# Altium PCB Motor Driver.PcbDoc
Units mil, origin at the board's own origin, x right, y up, seen from the top; angles counter-clockwise.
Board outline 1620 x 1620 mil, 4 copper layers (Top Layer, Signal Layer1, Signal Layer2, Bottom Layer), stack 23.756 mil thick; 62 components, 48 nets, 235 pads, 78 vias.
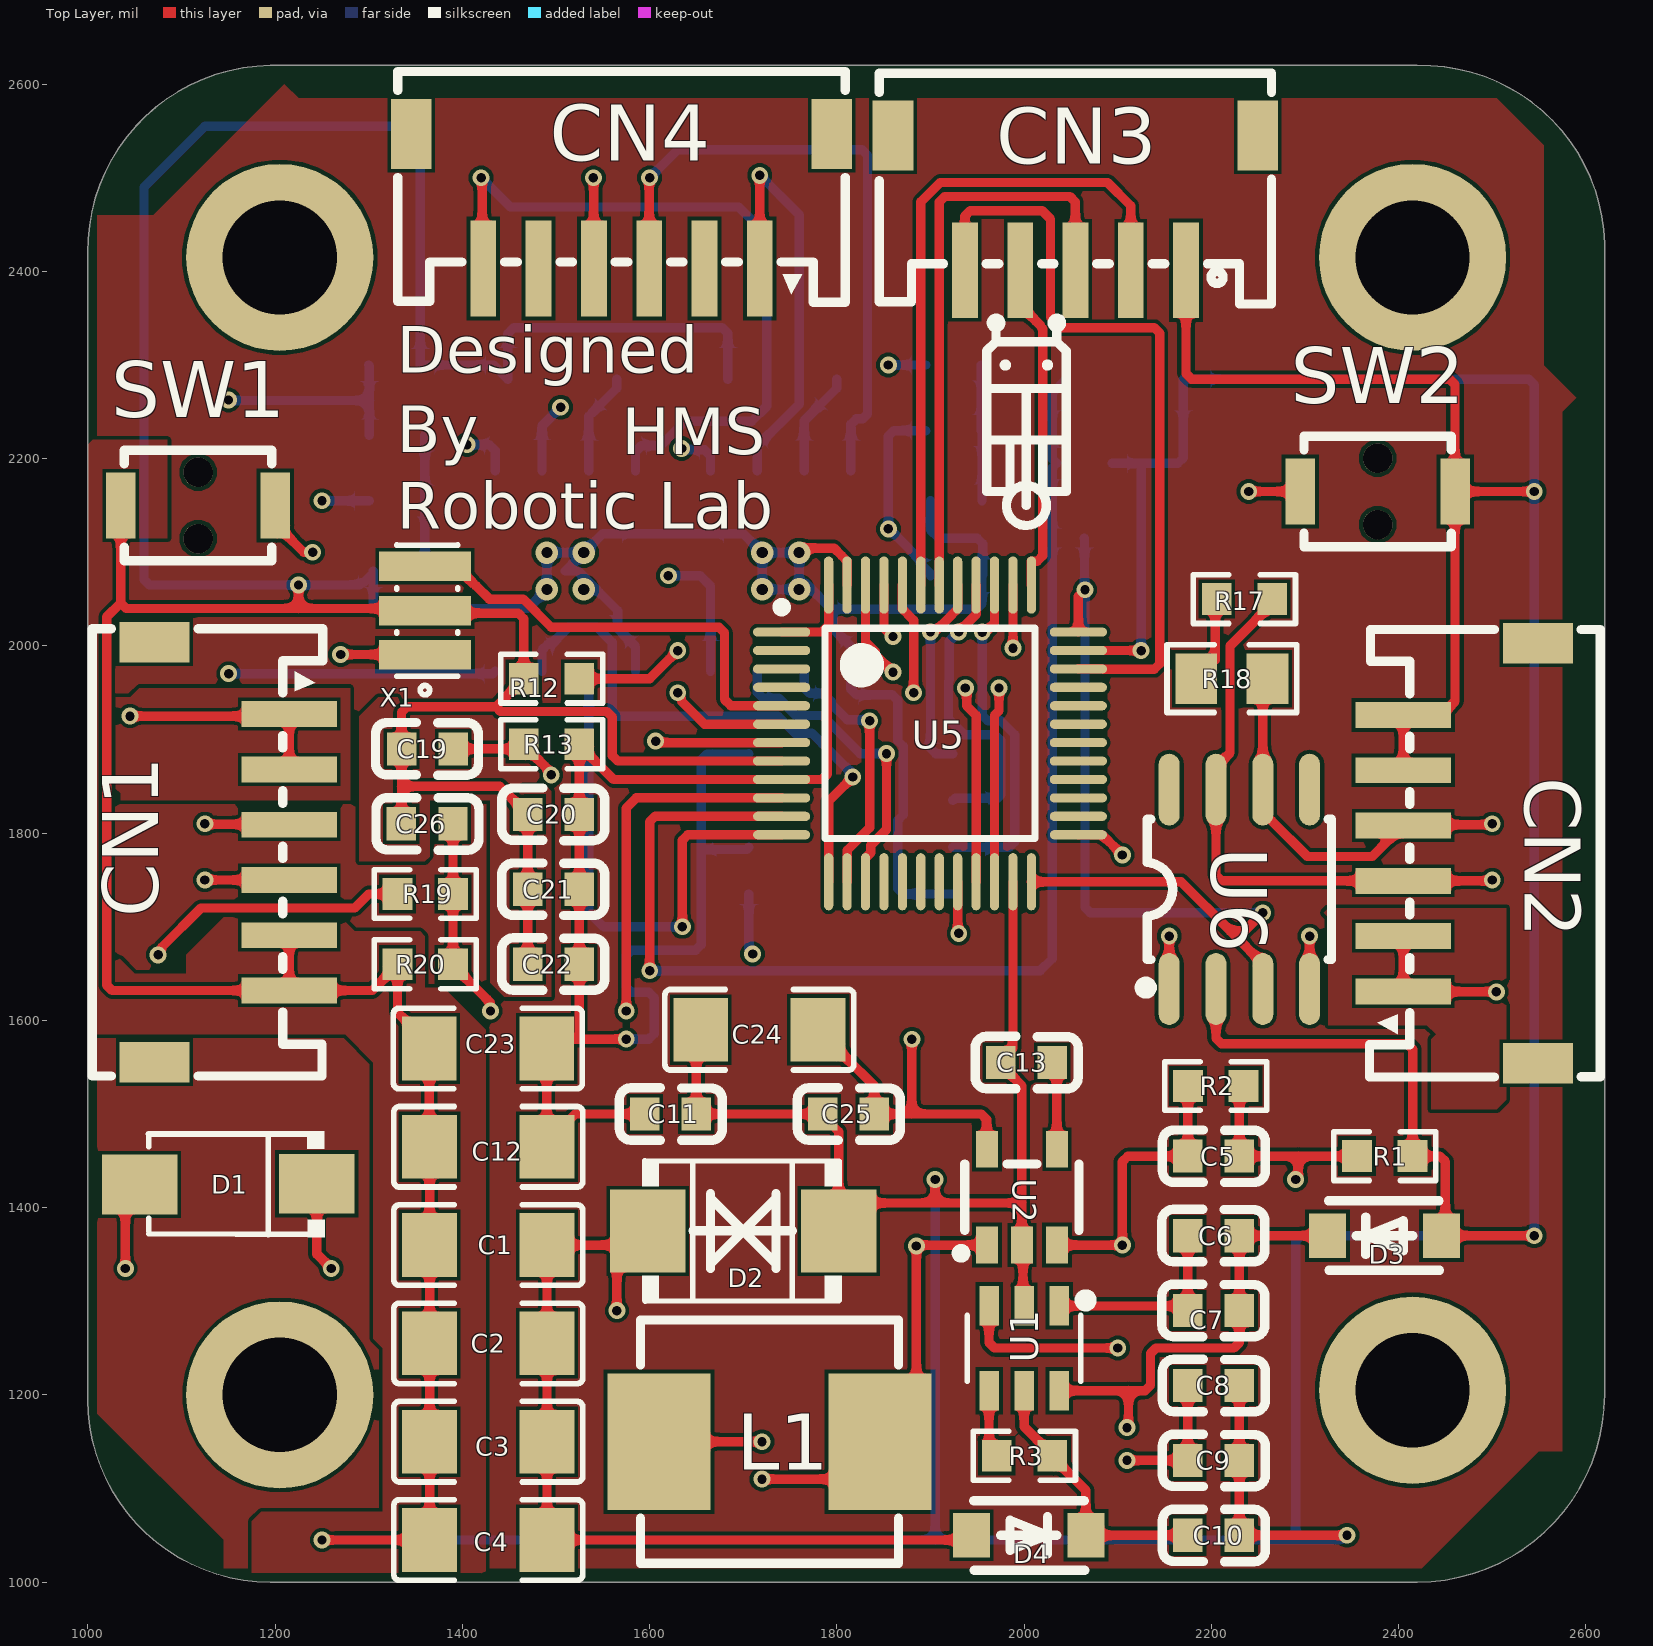
[diagram p0: Top Layer view]
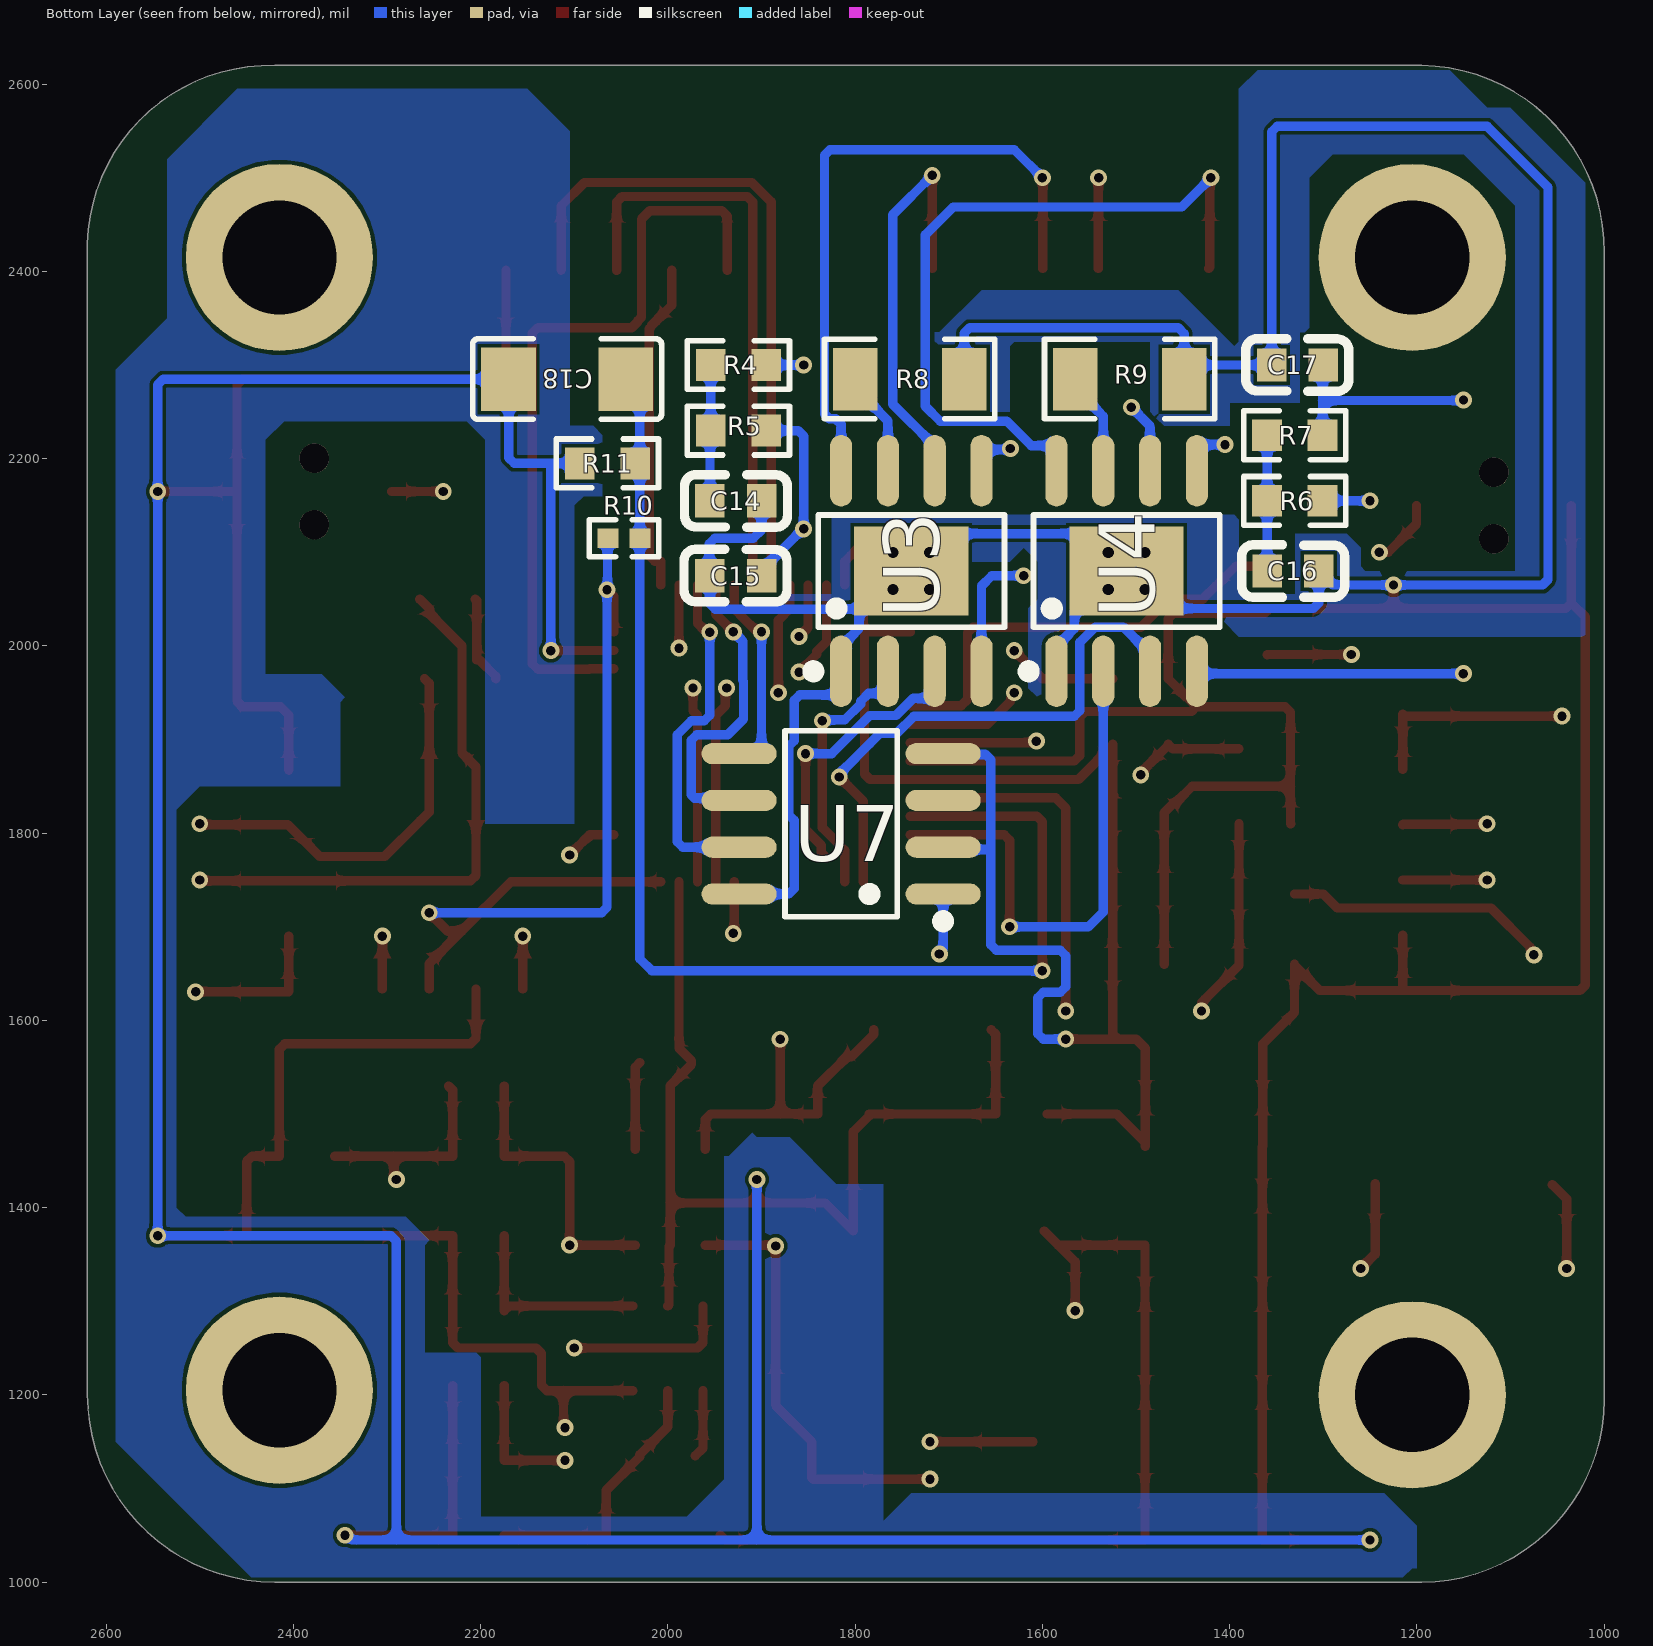
[diagram p1: Bottom Layer view, seen from below]
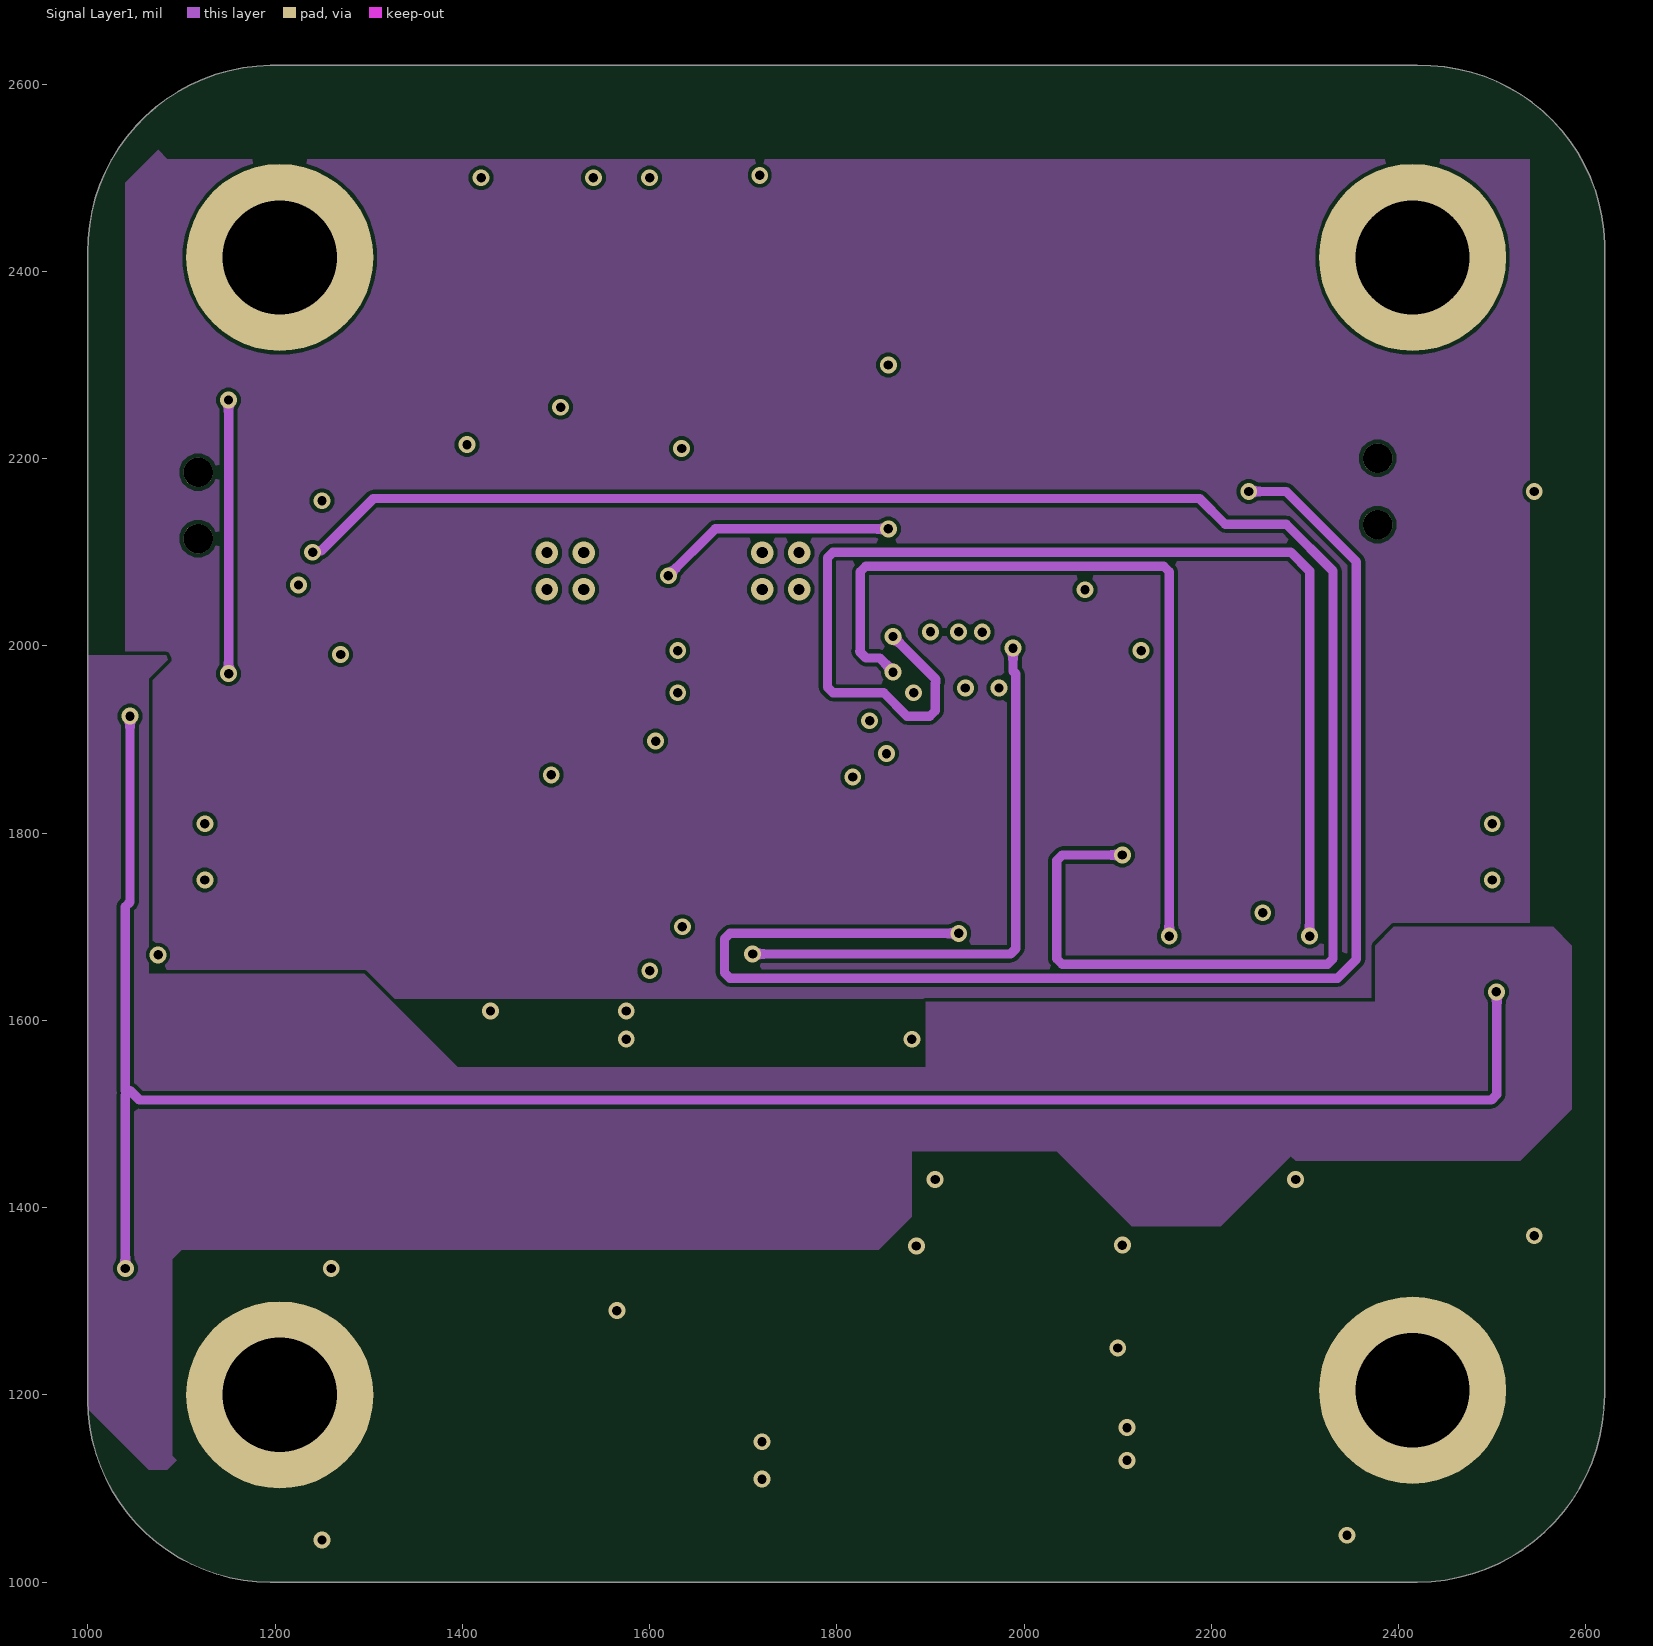
[diagram p2: Signal Layer1]
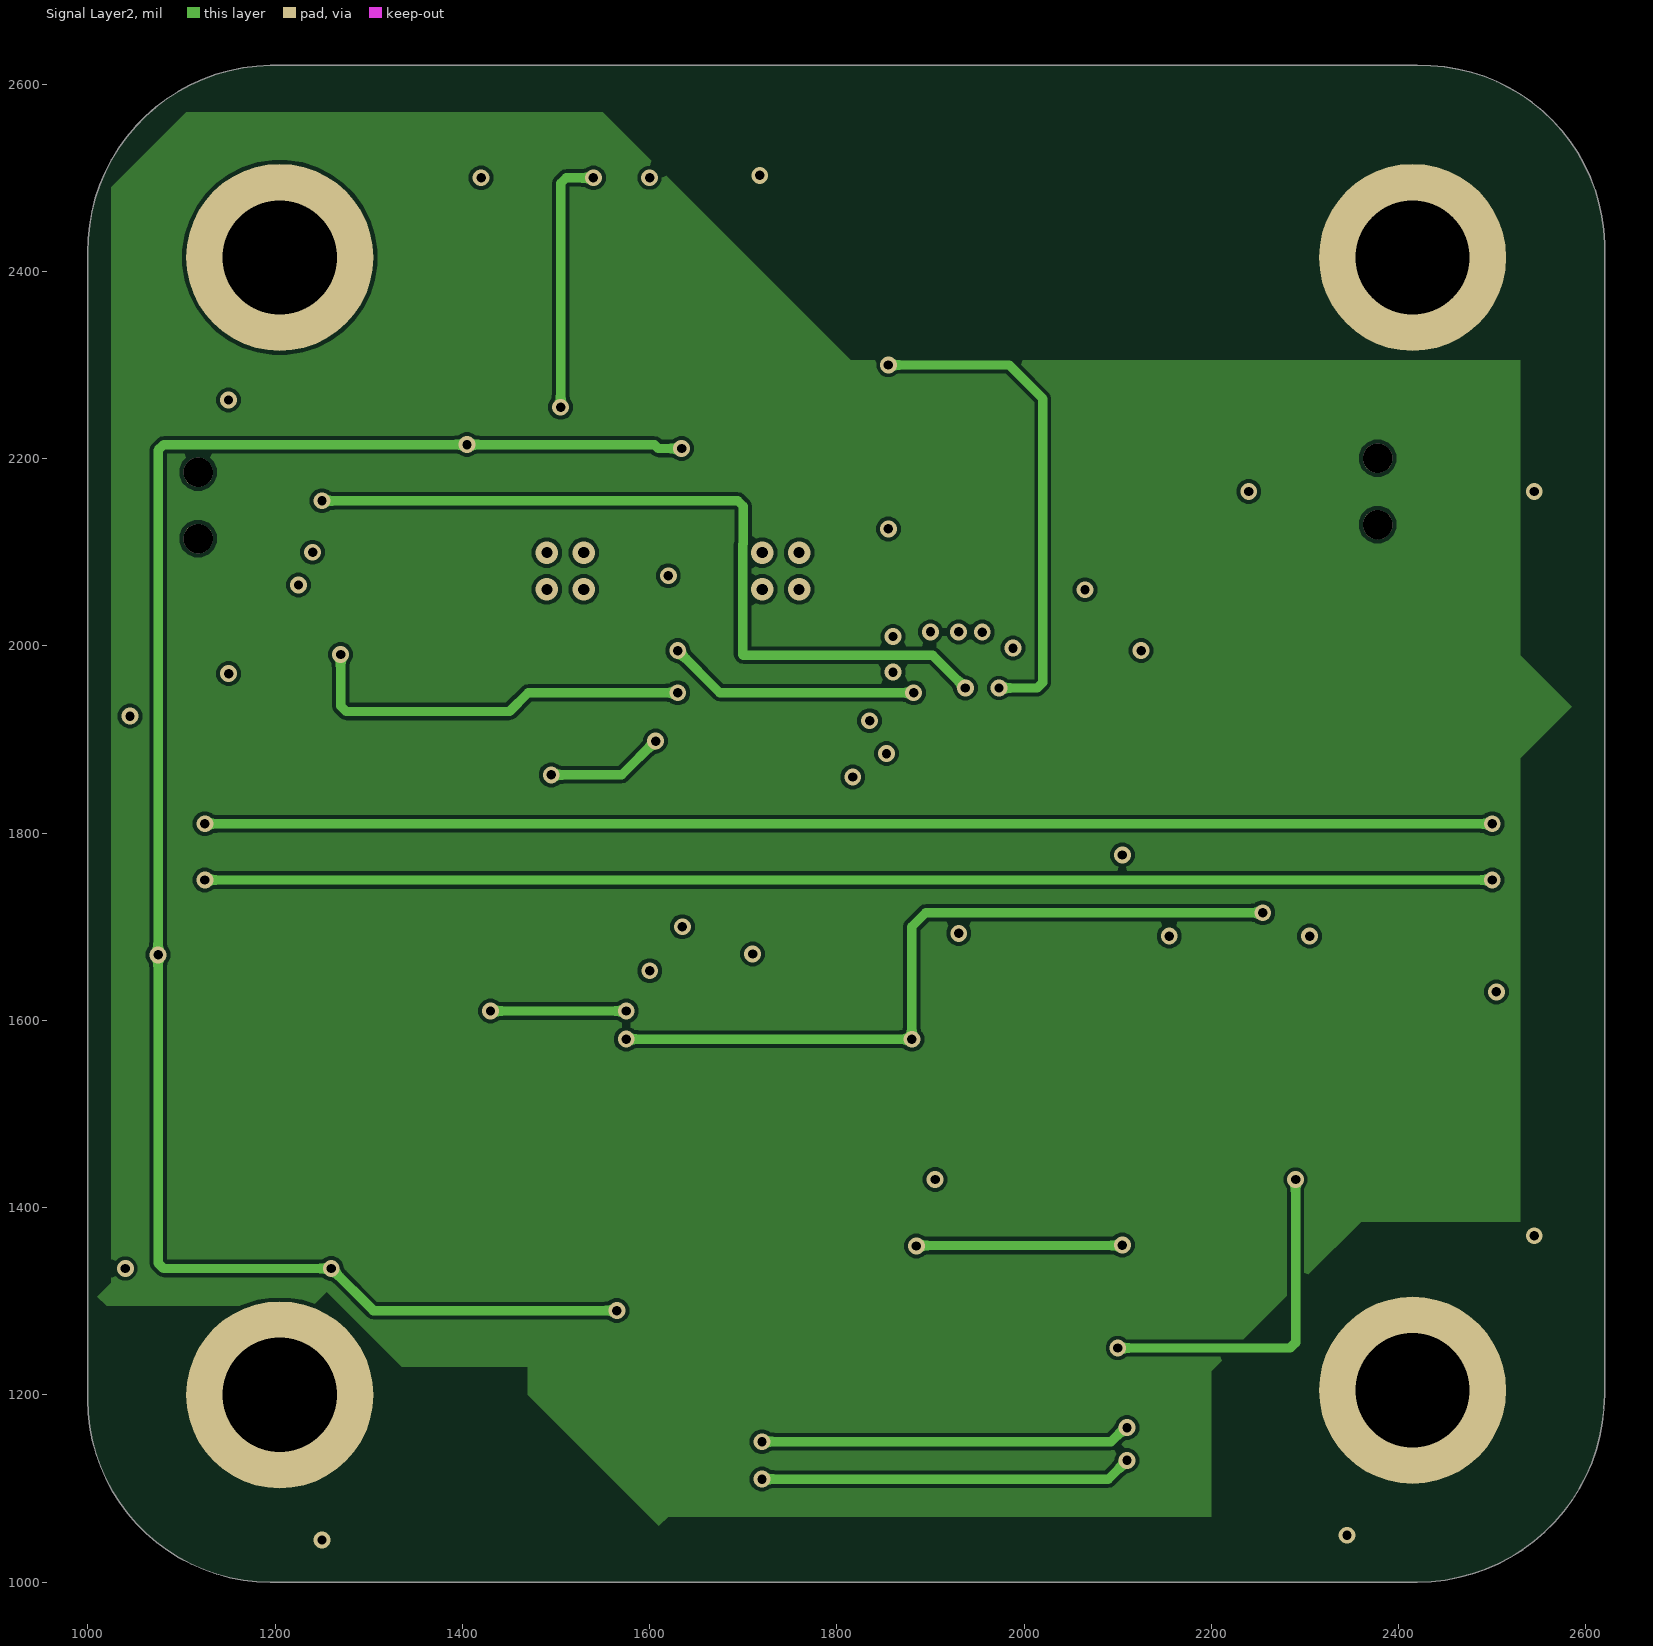
[diagram p3: Signal Layer2]

## Layer stack, top to bottom
Top Solder: solder mask 0.4, Solder Resist, Dk 3.5
Top Layer: signal copper 1.4
Dielectric 2: prepreg 2.8, PP-006, Dk 4.1
Signal Layer1: signal copper 1.378
Dielectric 1: dielectric 12.6, FR-4, Dk 4.8
Signal Layer2: signal copper 1.378
Dielectric 3: prepreg 2.8, PP-006, Dk 4.1
Bottom Layer: signal copper 1.4
Bottom Solder: solder mask 0.4, Solder Resist, Dk 3.5

## Board outline
1195,1000 cw(c1195,1195) 1000,1195 1000,2420 cw(c1197.5,2422.5) 1195,2620 2420,2620 cw(c2425,2425) 2620,2430 2620,1200 cw(c2420,1200) 2420,1000

## Design rules (kind name [scope] priority, off if disabled: settings)
Clearance [All] p1: gap=4 ignorepadtopadclearanceinfootprint=FALSE
HoleSize [All] p1: absolutevalues=TRUE maxlimit=10000 minlimit=8 maxpercent=80.000 minpercent=20.000
MinimumSolderMaskSliver [All] p1: minsoldermaskwidth=1
PolygonConnect [All] p1: connectstyle=Relief reliefconductorwidth=10 reliefentries=4 polygonreliefangle="90 Angle" airgapwidth=10
RoutingVias [All] p1: holewidth=28 width=50 viastyle="Through Hole" minholewidth=28 minwidth=50 maxholewidth=28 maxwidth=50
SilkToSilkClearance [All] p1: silktosilkclearance=0
SilkToSolderMaskClearance [IsPad] p1: minsilkscreentomaskgap=0 clearancetoexposedcopper=TRUE
SolderMaskExpansion [All] p1: expansion=4 istentingtop=FALSE
Width [All] p1: maxlimit=10 minlimit=10 preferedwidth=10
26 further rules are at their usual default settings.

## Classes and differential pairs
component class Port: C23 CN1 CN2 CN3 CN4 R17 R18 SW1 SW2 U6
component class MCU: C19 C20 C21 C22 R12 R13 U5 X1
component class Interface: C24 C25 C26 R19 R20 U7
component class Drive: C14 C15 C16 C17 C18 R4 R5 R6 R7 R8 R9 R10 R11 U3 U4
component class Power: C1 C2 C3 C4 C6 C7 C8 C9 C10 C11 C12 C13 D1 D2 D3 D4 L1 R1 R2 R3 U1 U2

## Components (designator, comment, footprint, x,y, rotation, side; value= is the part's Value field where it differs from the comment)
C1 "100uF" C1206 1427.7,1360 r180 top
C2 "100uF" C1206 1427.7,1255 r180 top
C3 "100uF" C1206 1427.7,1150 r180 top
C4 "100uF" C1206 1427.7,1045 r180 top
C5 "100pF" C0603 2202.45,1455 r180 top
C6 "100nF" C0603 2202.45,1370 r0 top
C7 "100nF" C0603 2202.45,1290 r0 top
C8 "100nF" C0603 2202.45,1210 r180 top
C9 "100nF" C0603 2202.45,1130 r180 top
C10 "100nF" C0603 2202.45,1050 r180 top
C11 "100nF" C0603 1622.44,1500 r180 top
C12 "10uF" C1206 1427.7,1465 r0 top
C13 "10nF" C0603 2002.44,1555 r180 top
C14 "100nF" C0603 1927.56,2155 r0 bottom
C15 "100nF" C0603 1927.56,2075 r180 bottom
C16 "100nF" C0603 1332.44,2080 r0 bottom
C17 "100nF" C0603 1327.44,2300 r180 bottom
C18 "10uF" C1206 2107.7,2285 r180 bottom
C19 "100nF" C0603 1362.56,1890 r0 top
C20 "100nF" C0603 1497.44,1820 r0 top
C21 "100nF" C0603 1497.44,1740 r0 top
C22 "100nF" C0603 1497.44,1660 r0 top
C23 "10uF" C1206 1427.3,1570 r180 top
C24 "10uF" C1206 1717.3,1590 r180 top
C25 "100nF" C0603 1812.56,1500 r180 top
C26 "100nF" C0603 1362.44,1810 r180 top
CN1 "HC-ZH-6PWT" CONN-SMD_6P-P1.50_HCTL_HC-ZH-6PWT 1143.15,1779.53 r270 top
CN2 "HC-ZH-6PWT" CONN-SMD_6P-P1.50_HCTL_HC-ZH-6PWT 2476.85,1778.58 r90 top
CN3 "HC-ZH-5PWT" CONN-SMD_5P-P1.50_HCTL_HC-ZH-5PWT 2054.88,2473.15 r180 top
CN4 "HC-ZH-6PWT" CONN-SMD_6P-P1.50_HCTL_HC-ZH-6PWT 1570,2475 r180 top
D1 "SS54" SMA_L4.3-W2.6-LS5.0-RD 1150,1425 r180 top
D2 "SMBJ28CA" SMB_L4.6-W3.6-LS5.3-BI 1700,1375 r180 top
D3 "1N5819W" SOD-123F_L2.8-W1.8-LS3.7-RD 2385,1370 r0 top
D4 "1N5819W" SOD-123F_L2.8-W1.8-LS3.7-RD 2005,1050 r180 top
L1 "6.8uH" IND-SMD_L7.0-W6.6 1728.11,1150 r0 top
R1 "1.8K" R0603 2385.34,1455 r180 top
R2 "10K" R0603 2204.66,1530 r180 top
R3 "1M" R0603 2000.35,1135 r0 top
R4 "1K" R0603 1924.65,2300 r0 bottom
R5 "1K" R0603 1924.65,2230 r180 bottom
R6 "1K" R0603 1330.35,2155 r0 bottom
R7 "1K" R0603 1330.35,2225 r180 bottom
R8 "0.1" R1206 1741.78,2285 r180 bottom
R9 "0.1" R1206 1506.78,2285 r180 bottom
R10 "NTCThermistor" R0402 2047.04,2115 r180 bottom
R11 "3.3K" R0603_NEW 2064.66,2195 r180 bottom
R12 "10K" R0603 1495.35,1965 r180 top
R13 "10K" R0603 1495.35,1895 r0 top
R17 "120" R0603 2235.34,2050 r180 top
R18 "0" R0805 2221.96,1965 r0 top
R19 "10K" R0603 1360.35,1735 r0 top
R20 "1K" R0603 1360.35,1660 r180 top
SW1 "K2-1807UA-A4DW-06" KEY-SMD_L4.0-W2.9-L 1117.67,2150 r0 top
SW2 "K2-1807UA-A4DW-06" KEY-SMD_L4.0-W2.9-L 2377.68,2165 r180 top
U1 "ME3116" SOT-23-6_L2.9-W1.6-P0.95-LS2.8-BL 2000,1249.76 r180 top
U2 "LP2992IM5-3.3/NOPB" SOT-23-5_L3.0-W1.7-P0.95-LS2.8-BR 1997.6,1411.18 r270 top
U3 "A4950ELJTR-T" SOIC-8_L4.9-W3.9-P1.27-LS6.0-BL-EP 1740,2080 r180 bottom
U4 "A4950ELJTR-T" SOIC-8_L4.9-W3.9-P1.27-LS6.0-BL-EP 1510,2080 r180 bottom
U5 "STM32F103CBT6" STM-LQFP48_L 1899.53,1906.54 r0 top
U6 "SN65HVD232DR" SOIC-8_L5.0-W4.0-P1.27-LS6.0-BL 2230,1740 r0 top
U7 "MT6816CT-ACD" SOP-8_L5.0-W4.0-P1.27-LS6.0-BL 1815,1810 r90 bottom
X1 "12MHz" CRYSTAL-SMD_3P-L3.2-W1.3-P1.2-BL 1360,2037.76 r90 top

## Footprints (in the part's own frame and the unit in brackets; to place one, negate y for a bottom-side part, rotate by r counter-clockwise, add the part's x,y. Pads: shape width x height; smd on the part's side, far side on the other; paste and mask are expansions set on the pad)
C0603 [mm]
  rect 0.8x0.9 smd: 1(-0.7,0) 2(0.7,0)
  silkscreen extent -1.41,-0.71 1.39,0.72
C1206 [mm]
  rect 1.485x1.728 smd: 1(-1.593,0) 2(1.593,0)
  silkscreen extent -2.56,-1.09 2.56,1.09
CONN-SMD_5P-P1.50_HCTL_HC-ZH-5PWT [mm]
  rect 0.7x2.6 smd: 1(-3,1.825) 2(-1.5,1.825) 3(0,1.825) 4(1.5,1.825) 5(3,1.825)
  rect 1.1x1.9 smd: 6(4.95,-1.825) 7(-4.95,-1.825)
  silkscreen extent -5.32,-3.52 5.32,2.74
CONN-SMD_6P-P1.50_HCTL_HC-ZH-6PWT [mm]
  rect 0.7x2.6 smd: 1(-3.75,1.825) 2(-2.25,1.825) 3(-0.75,1.825) 4(0.75,1.825) 5(2.25,1.825) 6(3.75,1.825)
  rect 1.1x1.9 smd: 7(-5.7,-1.825) 8(5.7,-1.825)
  silkscreen extent -6.07,-3.52 6.07,2.74
CRYSTAL-SMD_3P-L3.2-W1.3-P1.2-BL [mm]
  rect 0.8x2.5 smd: 1(-1.2,0) 2(0,0) 3(1.2,0)
  silkscreen extent -2.29,-0.89 1.78,0.76
IND-SMD_L7.0-W6.6 [mm]
  rect 2.8x3.7 smd: 1(-3,0) 2(3,0)
  silkscreen extent -3.5,-3.3 3.5,3.3
KEY-SMD_L4.0-W2.9-L [mm]
  rect 0.8x1.8 smd: 1(-2.1,0) 2(2.1,0)
  round 0.8 hole 0.8 unplated: ""(0,-0.9) ""(0,0.9)
  silkscreen extent -2,-1.5 2,1.5
R0402 [mm]
  rect 0.566x0.54 smd: 1(-0.433,0) 2(0.433,0)
  silkscreen extent -0.94,-0.5 0.94,0.5
R0603 [mil]
  rect 31.75x34.02 smd: 1(-29.66,0) 2(29.65,0)
  silkscreen extent -55,-26 55,26
R0603_NEW [mil]
  rect 31.75x34.02 smd: 1(-29.65,0) 2(29.66,0)
  silkscreen extent -55,-26 55,26
R0805 [mil]
  rect 44.59x54.21 smd: 1(-38.04,0) 2(38.04,0)
  silkscreen extent -69,-36 69,36
R1206 [mil]
  rect 47.54x66.97 smd: 1(-58.22,0) 2(58.22,0)
  silkscreen extent -91,-42 91,42
SMA_L4.3-W2.6-LS5.0-RD [mm]
  rect 2.046x1.62 smd: 1(-2.404,-0.009) 2(2.404,0.009)
  silkscreen extent -2.61,-1.44 2.16,1.44
SMB_L4.6-W3.6-LS5.3-BI [mil]
  rect 80.61x88.23 smd: 1(-102.02,0) 2(102.02,0)
  silkscreen extent -105,-75 108,75
SOD-123F_L2.8-W1.8-LS3.7-RD [mm]
  rect 1x1.2 smd: 1(-1.55,0) 2(1.55,0)
  silkscreen extent -1.52,-0.93 1.49,0.95
SOIC-8_L4.9-W3.9-P1.27-LS6.0-BL-EP [mm]
  oval 0.602x1.941 smd: 1(-1.905,-2.72) 2(-0.635,-2.72) 3(0.635,-2.72) 4(1.905,-2.72) 5(1.905,2.72) 6(0.635,2.72) 7(-0.635,2.72) 8(-1.905,2.72)
  rect 3.098x2.41 smd: 9(0,0)
  silkscreen extent -2.81,-2.87 2.53,1.52
SOIC-8_L5.0-W4.0-P1.27-LS6.0-BL [mil]
  oval 22.38x76.78 smd: 1(-75,-106.5) 2(-25,-106.5) 3(25,-106.5) 4(75,-106.5) 5(75,106.5) 6(25,106.5) 7(-25,106.5) 8(-75,106.5)
  silkscreen extent -106,-111 98,75
SOP-8_L5.0-W4.0-P1.27-LS6.0-BL [mil]
  oval 22.6x80.14 smd: 1(-75,-108.97) 2(-25,-108.97) 3(25,-108.97) 4(75,-108.97) 5(75,108.97) 6(25,108.97) 7(-25,108.97) 8(-75,108.97)
  silkscreen extent -110,-115 99,60
SOT-23-5_L3.0-W1.7-P0.95-LS2.8-BR [mm]
  rect 1x0.6 smd: 1(1.3,-0.95) 2(1.3,0) 3(1.3,0.95) 4(-1.3,0.95) 5(-1.3,-0.95)
  silkscreen extent -0.9,-1.78 1.65,1.55
SOT-23-6_L2.9-W1.6-P0.95-LS2.8-BL [mm]
  rect 0.532x1.072 smd: 1(-0.95,-1.149) 2(0,-1.149) 3(0.95,-1.149) 4(0.95,1.149) 5(0,1.149) 6(-0.95,1.149)
  silkscreen extent -1.82,-1.45 1.54,0.89
STM-LQFP48_L [mm] "QFP, 48-Leads, Body 7x7mm, Pitch 0.5mm, IPC High Density"
  oval 1.55x0.25 smd: 1(-4.025,2.75) 2(-4.025,2.25) 3(-4.025,1.75) 4(-4.025,1.25) 5(-4.025,0.75) 6(-4.025,0.25) 7(-4.025,-0.25) 8(-4.025,-0.75) 9(-4.025,-1.25) 10(-4.025,-1.75) 11(-4.025,-2.25) 12(-4.025,-2.75) 25(4.025,-2.75) 26(4.025,-2.25) 27(4.025,-1.75) 28(4.025,-1.25) 29(4.025,-0.75) 30(4.025,-0.25) 31(4.025,0.25) 32(4.025,0.75) 33(4.025,1.25) 34(4.025,1.75) 35(4.025,2.25) 36(4.025,2.75)
  oval 0.25x1.55 smd: 13(-2.75,-4.025) 14(-2.25,-4.025) 15(-1.75,-4.025) 16(-1.25,-4.025) 17(-0.75,-4.025) 18(-0.25,-4.025) 19(0.25,-4.025) 20(0.75,-4.025) 21(1.25,-4.025) 22(1.75,-4.025) 23(2.25,-4.025) 24(2.75,-4.025) 37(2.75,4.025) 38(2.25,4.025) 39(1.75,4.025) 40(1.25,4.025) 41(0.75,4.025) 42(0.25,4.025) 43(-0.25,4.025) 44(-0.75,4.025) 45(-1.25,4.025) 46(-1.75,4.025) 47(-2.25,4.025) 48(-2.75,4.025)
  silkscreen extent -4.15,-2.85 2.85,3.55, body extent -3.5,-3.5 3.5,3.5, height 1.6

## Part data
C1 C2 C3 C4: BOM_JLCPCB Part Class="Extended Part", BOM_Manufacturer="Murata Electronics", BOM_Manufacturer Part=GRM31CR61A107ME05L, BOM_Supplier=LCSC, BOM_Supplier Part=C312983, Contributor=LCSC, nameAlias=Capacitance, spicePre=C, spiceSymbolName=GRM31CR61A107ME05L
C5: BOM_JLCPCB Part Class="Extended Part", BOM_Manufacturer=YAGEO, BOM_Manufacturer Part=CC0603JRNPO9BN101, BOM_Supplier=LCSC, BOM_Supplier Part=C14665, nameAlias=Capacitance, spicePre=C, spiceSymbolName=CC0603JRNPO9BN101
C6 C7 C8 C9 C10 C11 C14 C15 C16 C17 C19 C20 C21 C22 C25 C26: BOM_JLCPCB Part Class="Extended Part", BOM_Manufacturer=SAMSUNG, BOM_Manufacturer Part=CL10B104KB8NNNC, BOM_Supplier=LCSC, BOM_Supplier Part=C1591, nameAlias=Capacitance, spicePre=C, spiceSymbolName=CL10B104KB8NNNC
C12 C18 C23 C24: BOM_JLCPCB Part Class="Basic Part", BOM_Manufacturer=SAMSUNG, BOM_Manufacturer Part=CL31A106KBHNNNE, BOM_Supplier=LCSC, BOM_Supplier Part=C13585, nameAlias=Capacitance, spicePre=C, spiceSymbolName=CL31A106KBHNNNE
C13: BOM_JLCPCB Part Class="Extended Part", BOM_Manufacturer=YAGEO, BOM_Manufacturer Part=CC0603KRX7R9BB103, BOM_Supplier=LCSC, BOM_Supplier Part=C100042, nameAlias=Capacitance, spicePre=C, spiceSymbolName=CC0603KRX7R9BB103
CN1 CN2 CN3 CN4: BOM_Manufacturer=HCTL(华灿天禄), BOM_Supplier=LCSC, Contributor=LCSC, spicePre=C
  CN1 CN2 CN4: BOM_Manufacturer Part=HC-ZH-6PWT, BOM_Supplier Part=C2845428, spiceSymbolName=HC-ZH-6PWT
  CN3: BOM_Manufacturer Part=HC-ZH-5PWT, BOM_Supplier Part=C2845427, spiceSymbolName=HC-ZH-5PWT
D1: library part SS54_C727065, BOM_JLCPCB Part Class="Extended Part", BOM_Manufacturer=TWGMC, BOM_Manufacturer Part=SS54, BOM_Supplier=LCSC, BOM_Supplier Part=C727065, Contributor=LCSC, spicePre=D, spiceSymbolName=SS54_C727065
D2: library part SMBJ28CA_C908204, BOM_JLCPCB Part Class="Extended Part", BOM_Manufacturer=FUXINSEMI, BOM_Manufacturer Part=SMBJ28CA, BOM_Supplier=LCSC, BOM_Supplier Part=C908204, Contributor=LCSC, spicePre=D, spiceSymbolName=SMBJ28CA_C908204
D3 D4: BOM_JLCPCB Part Class="Extended Part", BOM_Manufacturer="Shandong Jingdao Microelectronics", BOM_Manufacturer Part=1N5819W, BOM_Supplier=LCSC, BOM_Supplier Part=C169540, Contributor=LCSC, spicePre=D, spiceSymbolName=1N5819W
L1: BOM_JLCPCB Part Class="Extended Part", BOM_Manufacturer=Sunlord, BOM_Manufacturer Part=MWSA0603S-6R8MT, BOM_Supplier=LCSC, BOM_Supplier Part=C408449, Contributor=LCSC, nameAlias=Inductance, spicePre=L, spiceSymbolName=MWSA0603S-6R8MT
R1: BOM_JLCPCB Part Class="Basic Part", BOM_Manufacturer=UniOhm, BOM_Manufacturer Part=0603WAF1801T5E, BOM_Supplier=LCSC, BOM_Supplier Part=C4177, nameAlias="Resistance (Ohms)", spicePre=R, spiceSymbolName=0603WAF1801T5E
R2 R12 R13 R19: BOM_JLCPCB Part Class="Basic Part", BOM_Manufacturer=UniOhm, BOM_Manufacturer Part=0603WAF1002T5E, BOM_Supplier=LCSC, BOM_Supplier Part=C25804, nameAlias="Resistance (Ohms)", spicePre=R, spiceSymbolName=0603WAF1002T5E
R3: BOM_JLCPCB Part Class="Basic Part", BOM_Manufacturer=UniOhm, BOM_Manufacturer Part=0603WAF1004T5E, BOM_Supplier=LCSC, BOM_Supplier Part=C22935, nameAlias="Resistance (Ohms)", spicePre=R, spiceSymbolName=0603WAF1004T5E
R4 R5 R6 R7 R20: BOM_JLCPCB Part Class="Basic Part", BOM_Manufacturer=UniOhm, BOM_Manufacturer Part=0603WAF1001T5E, BOM_Supplier=LCSC, BOM_Supplier Part=C21190, nameAlias="Resistance (Ohms)", spicePre=R, spiceSymbolName=0603WAF1001T5E
R8 R9: BOM_JLCPCB Part Class="Basic Part", BOM_Manufacturer=UniOhm, BOM_Manufacturer Part=1206W4F100LT5E, BOM_Supplier=LCSC, BOM_Supplier Part=C25334, nameAlias="Resistance (Ohms)", spicePre=R, spiceSymbolName=1206W4F100LT5E
R10: BOM_JLCPCB Part Class="Extended Part", BOM_Manufacturer=MuRata, BOM_Manufacturer Part=NCP15XH103F03RC, BOM_Supplier=LCSC, BOM_Supplier Part=C77131, nameAlias=Value, spicePre=R, spiceSymbolName=NCP15XH103F03RC
R11: BOM_JLCPCB Part Class="Basic Part", BOM_Manufacturer=UniOhm, BOM_Manufacturer Part=0603WAF3301T5E, BOM_Supplier=LCSC, BOM_Supplier Part=C22978, nameAlias="Resistance (Ohms)", spicePre=R, spiceSymbolName=0603WAF3301T5E
R17: BOM_JLCPCB Part Class="Basic Part", BOM_Manufacturer=UniOhm, BOM_Manufacturer Part=0603WAF1200T5E, BOM_Supplier=LCSC, BOM_Supplier Part=C22787, nameAlias="Resistance (Ohms)", spicePre=R, spiceSymbolName=0603WAF1200T5E
R18: BOM_JLCPCB Part Class="Extended Part", BOM_Manufacturer=WTC, BOM_Manufacturer Part=WR08X000PTL, BOM_Supplier=LCSC, BOM_Supplier Part=C112378, nameAlias="Resistance (Ohms)", spicePre=R, spiceSymbolName=WR08X000PTL
SW1 SW2: BOM_JLCPCB Part Class="Extended Part", BOM_Manufacturer="Korean Hroparts Elec", BOM_Manufacturer Part=K2-1807UA-A4DW-06, BOM_Supplier=LCSC, BOM_Supplier Part=C502307, Contributor=LCSC, spicePre=S, spiceSymbolName=K2-1807UA-A4DW-06
U1: library part TP6841S6-A, BOM_JLCPCB Part Class="Extended Part", BOM_Manufacturer="TECH PUBLIC(台舟)", BOM_Manufacturer Part=TP6841S6-A, BOM_Supplier=LCSC, BOM_Supplier Part=C2844924, Contributor=LCSC, spicePre=U, spiceSymbolName=TP6841S6-A
U2 U6: BOM_JLCPCB Part Class="Extended Part", BOM_Manufacturer=TI, BOM_Supplier=LCSC, spicePre=U
  U2: BOM_Manufacturer Part=LP2992IM5-3.3/NOPB, BOM_Supplier Part=C129353, Contributor=LCSC, spiceSymbolName=LP2992IM5-3.3/NOPB
  U6: BOM_Manufacturer Part=SN65HVD232DR, BOM_Supplier Part=C30530, spiceSymbolName=SN65HVD232DR
U3 U4: BOM_JLCPCB Part Class="Extended Part", BOM_Manufacturer=ALLEGRO, BOM_Manufacturer Part=A4950ELJTR-T, BOM_Supplier=LCSC, BOM_Supplier Part=C82404, spicePre=U, spiceSymbolName=A4950ELJTR-T
U5: library part CMP-0237-00250-3, "ARM Cortex-M3 32-bit MCU, 128 KB Flash, 20 KB Internal RAM, 37 I/Os, 48-pin LQFP, -40 to 85 degC, Tray", I/Os (High Current)=37, Operating Frequency(F) (Processor speed) (MHz)=72, Supply Voltage(Vcc) min (V)=2, A/D Converter="2x12-bit (10 Channel)", ComponentLink1Description="Manufacturer URL", ComponentLink1URL=http://www.st.com/web/en/home.html, ComponentLink2Description=Datasheet, ComponentLink2URL=http://www.st.com/st-web-ui/static/active/en/resource/technical/document/datasheet/CD00161566.pdf, ComponentLink3Description="Package Specification", ComponentLink3URL=http://www.st.com/st-web-ui/static/active/en/resource/technical/document/datasheet/DM00058181.pdf, Core="ARM Cortex-M3", DatasheetVersion="Rev. 16", FLASH Size (Prog) (kB)=128, Internal RAM Size (kB)=20, Mounting Technology="Surface Mount", PackageDescription="48-Pin Low Profile Quad Flat Package, 7 x 7 mm Body, 0.5 mm Pitch", PackageReference=LQFP48, PackageVersion="Rev. 6, 06/2013", Packing=Tray, PartNumber=STM32F103CBT6
U7: BOM_JLCPCB Part Class="Extended Part", BOM_Manufacturer="Magn Tek", BOM_Manufacturer Part=MT6816CT-ACD, BOM_Supplier=LCSC, BOM_Supplier Part=C879560, Contributor=LCSC, spicePre=U, spiceSymbolName=MT6816CT-ACD
X1: BOM_JLCPCB Part Class="Extended Part", BOM_Manufacturer=muRata(村田), BOM_Manufacturer Part=CSTNE12M0G52A000R0, BOM_Supplier=LCSC, BOM_Supplier Part=C907957, Contributor=LCSC, nameAlias=Frequency, spicePre=X, spiceSymbolName=CSTNE12M0G52A000R0

## Free pads (board coordinates)
  round 200 hole 122.05: GND(1205,1200) GND(1205,2415) GND(2415,1205) GND(2415,2415)

## Via types
v1: diameter 18, hole 10, Top Layer to Bottom Layer, 70 vias
v2: diameter 24, hole 12, Top Layer to Bottom Layer, 8 vias

## Nets (pads, with @x,y where several pads share a name; then routed paths per layer and width w, separated by ;. In a path a pad name is that pad's centre, name@x,y a point inside that pad or via, vN(x,y) a via of type N, cw(c..) or ccw(c..) an arc to the next point about the centre after c; other vN are vias at no path point)
BUTTON_1: SW1.2 U5.25 | length 2165.1
  Top Layer w10: SW1.2 1200.35,2130.32 1230.67,2100 v1(1240,2100) ; U5.25 2083.43,1798.27 v1(2105,1776.69)
  Signal Layer1 w10: v1(1240,2100) 1241.53,2101.53 1249.03,2101.53 1305,2157.5 2187.5,2157.5 2215,2130 2280,2130 2330,2080 2330,1665.86 2324.14,1660 2040.86,1660 2035,1665.86 2035,1770.84 2040.86,1776.69 v1(2105,1776.69)
BUTTON_2: SW2.2 U5.20 | length 1656.1
  Top Layer w10: U5.20 1929.13,1747.99 1929.13,1694.01 v1(1930.17,1692.97) ; v1(2240,2165) SW2.2
  Signal Layer1 w10: v1(1930.17,1692.97) 1685.86,1692.97 1680,1687.11 1680,1650.86 1685.86,1645 2334.8,1645 2355,1665.2 2355,2090 2280,2165 v1(2240,2165)
CAN_H: CN1.4 CN2.3 R17.1 U6.7 | length 2082.8
  Top Layer w10: v1(1124.98,1750.02) CN1.4 ; R17.1 2254.12,2039.12 2254.12,2034.12 2220,2000 2220,1885.75 2205,1870.75 2205,1754.91 2210.86,1749.06 2499.05,1749.06 v1(2500,1750)
  Signal Layer2 w10: v1(1124.98,1750.02) v1(2500,1750)
CAN_L: CN1.3 CN2.4 R18.2 U6.6 | length 1889
  Top Layer w10: v1(1125,1810) 1125.47,1809.53 1214.53,1809.53 CN1.3 ; R18.2 2255,1960 2255,1822.65 2264.54,1813.11 2302.65,1775 2371.89,1775 CN2.4 2405.95,1809.06 2499.05,1809.06 v1(2500,1810)
  Signal Layer2 w10: v1(1125,1810) v1(2500,1810)
CAN_RX: U5.45 U6.4 | length 1398.2
  Top Layer w10: U5.45 1850.32,2019.68 v1(1860,2010) ; U6.4 v1(2305,1690)
  Signal Layer1 w10: v1(1860,2010) 1905.86,1964.14 1905.86,1960.86 1905,1960 1905,1930.86 1899.14,1925 1875,1925 1850,1950 1795.86,1950 1790,1955.86 1790,2094.14 1795.86,2100 2285,2100 2305,2080 v1(2305,1690)
CAN_TX: U5.46 U6.1 | length 1016.5
  Top Layer w10: U5.46 1830.63,2004.37 1840.99,1994.01 1840.99,1991.01 v1(1860,1972) ; U6.1 v1(2155,1690)
  Signal Layer1 w10: v1(1860,1972) 1860,1972.84 1845.76,1987.07 1831.21,1987.07 1824.14,1994.14 1825,1995 1825,2079.14 1830.86,2085 2149.14,2085 2155,2079.14 v1(2155,1690)
GND: C1.2 C2.2 C3.2 C4.2 C8.1 C9.1 C10.1 C11.1 C12.1 C13.2 C14.1 C15.1 C16.1 C17.1 C18.1 C19.1 C20.1 C21.1 C22.1 C23.2 C24.2 C25.2 C26.2 CN1.5 CN1.6 CN2.5 CN2.6 CN3.1 D2.1 D3.2 R1.1 R8.2 R9.2 R11.1 R12.2 R20.2 SW1.1 SW2.1 U1.2 U2.2 U3.1 U3.9 U4.1 U4.9 U5.8 U5.23 U5.35 U5.47 U6.2 U7.8 X1.2 | length 13104.5
  Top Layer w10: SW1.1 1035,2045.86 ; CN1.5 CN1.6 ; v1(1225,2065) 1225,2040 ; v1(1250,1045) C4.2 C3.2 C2.2 C1.2 C12.1 1364.61,1465.39 C23.2 1364.61,1574.78 1330.69,1608.7 R20.2@1330.69,1658.87 ; R20.2 R20.2@1330.69,1658.87 ; C26.2 1335,1810.11 1335,1850.06 ; C22.1 C21.1 C20.1 1469.89,1821.97 1459.14,1832.72 1457.17,1832.72 1439.84,1850.06 1335,1850.06 ; C24.2 1650,1585.39 C11.1 C25.2 1785,1498.03 1802.02,1481.01 D2.1 1832.02,1405 1905,1405 ; U5.8 1565.86,1877.01 1560,1882.87 1560,1924.14 1554.14,1930 1440.69,1930 1435.69,1935 ; v2@1768.3,2104.51 1797.03,2104.51 1805.18,2096.36 1805.18,2096.2 1810.94,2090.43 U5.47 ; v1(1905,1430) 1905,1405 ; U5.23 1988.11,1570.19 1974.89,1556.97 C13.2 1974.89,1553.03 1997.6,1530.32 1997.6,1405 ; U1.2 1998.8,1296.2 1998.8,1358.8 U2.2 1997.6,1405 ; U5.35 2058.05,1995.06 2124.94,1995.06 v1(2125,1995) ; CN3.1 2172.99,2290.86 2178.85,2285 2454.5,2285 2460.35,2279.14 SW2.1 ; U6.2 2205,1580.86 2210.86,1575 2409.14,1575 2415,1569.14 R1.1 2444.14,1455 2450,1449.14 2450,1373.98 D3.2 v1(2545,1370) ; C8.1 C9.1 C10.1 v1(2345,1050) ; CN2.5 CN2.6 2413.78,1935 2454.5,1935 2460.35,1940.86 SW2.1 ; v1(2545,2165) SW2.1 ; 1035,2045.86 1020,2030.86 1020,1637.75 1025.86,1631.89 CN1.6 ; 1035,2045.86 1040.86,2040 1225,2040 ; CN1.6 1303.71,1631.89 R20.2@1330.69,1658.87 ; 1225,2040 1357.76,2040 X1.2 1362.76,2035 1459.83,2035 1465.69,2029.14 R12.2 1435.69,1935 ; 1335,1850.06 C19.1 1335,1929.14 1340.86,1935 1435.69,1935 ; 1905,1405 1997.6,1405
  Bottom Layer w10: v1(1250,1045) 1905,1045 ; C16.1 C16.1@1304.89,2078.03 ; U4.1 1585,1999.25 1565.98,2018.27 1565.98,2037.56 1523.54,2080 U4.9 v2(1529.68,2099.68) ; R8.2 1683.56,2334.14 1677.7,2340 1455,2340 1448.56,2333.56 R9.2 1433.56,2300 C17.1 1355,2549.14 1349.14,2555 1125,2555 1060,2490 1060,2070.86 1065.86,2065 v1(1225,2065) 1289.89,2065 1292.17,2067.28 1294.14,2067.28 C16.1@1304.89,2078.03 ; U3.9@1766.46,2067.09 U3.9@1795.98,2037.56 ; U3.1 1815,1954.03 1821.33,1947.71 1859.14,1947.71 1865.07,1941.78 1865.07,1898.74 1871,1892.81 1871,1819.66 1865,1813.66 1865,1740.86 1870.86,1735 U7.8 ; U3.1@1815,1999.25 1795.98,2018.27 U3.9@1795.98,2037.56 ; C14.1 1900,2123.86 1908.86,2115 1950,2115 1955.86,2109.14 1955.86,2075.75 C15.1 1955.11,2045.11 1949.25,2039.25 1795.98,2039.25 U3.9@1795.98,2037.56 ; v1(1905,1430) 1905,1045 ; R11.1 2164.14,2195 2170,2200.86 2170,2284.61 C18.1 2539.14,2285 2545,2279.14 v1(2545,2165) v1(2545,1370) 2295.86,1370 2290,1364.14 2290,1045 ; v1(2125,1995) 2125,2190 ; v1(2345,1050) 2342.84,1050 2337.84,1045 2290,1045 ; C16.1@1304.89,2078.03 1304.89,2045.86 1310.75,2040 1470,2040 v2(1490.31,2060.31) v2(1490.31,2099.68) v2(1529.68,2099.68) ; v2(1529.68,2099.68) 1550,2120 1700,2120 v2(1720.31,2099.68) ; v2(1720.31,2099.68) v2(1720.31,2060.31) v2(1759.68,2060.31) v2(1759.68,2099.68) v2(1720.31,2099.68) ; 1905,1045 2290,1045
  other v2: 1529.68,2060.31
IN_AM: U3.2 U5.14 | length 285.7
  Top Layer w10: U5.14 1811.02,1748.15 1811.02,1781.7 1835,1805.68 v1(1835,1920)
  Bottom Layer w10: U3.2 1765,1955.61 1771.33,1949.28 1785.72,1949.28 1794.15,1940.85 1794.15,1937.9 1811,1921.05 1833.95,1921.05 v1(1835,1920)
IN_AP: U3.3 U5.15 | length 308.3
  Top Layer w10: U5.15@1830.71,1773.58 1836.39,1779.27 1836.39,1787.27 1853,1803.88 v1(1853,1885)
  Bottom Layer w10: U3.3 1715,1950.24 1721.33,1943.91 1738.13,1943.91 1756.36,1925.69 1784.31,1925.69 1825,1885 v1(1853,1885)
IN_BM: U4.2 U5.12 | length 564.5
  Top Layer w10: v1(1635,1700) 1635,1792.41 1640.86,1798.27 U5.12
  Bottom Layer w10: U4.2 1535,1715.86 1550.86,1700 v1(1635,1700)
IN_BP: U4.3 U5.13 | length 598.2
  Top Layer w10: U5.13 1791.26,1834.26 v1(1817,1860)
  Bottom Layer w10: U4.3 1485,1995.54 1491.33,2001.87 1495.22,2001.87 1513.45,2020.1 1543.64,2020.1 1560,2003.74 1560,1930.86 1565.86,1925 1737.25,1925 1755.38,1906.87 1773.13,1906.87 1784.33,1895.67 1813,1867 1813,1866.16 1817,1862.16 v1(1817,1860)
IN_PWM_A: R4.1 U5.22 | length 781.2
  Top Layer w10: U5.22 1968.43,1926 1973.28,1930.85 v1(1973.28,1955)
  Signal Layer2 w10: v1(1855,2300) 1984.14,2300 2020,2264.14 2020,1960.86 2014.14,1955 v1(1973.28,1955)
  Bottom Layer w10: v1(1855,2300) R4.1
IN_PWM_B: R6.1 U5.21 | length 1126.3
  Top Layer w10: v1(1937.28,1955) 1938.81,1953.47 1938.81,1935.93 1948.74,1926 U5.21
  Signal Layer2 w10: v1(1250,2155) 1694.14,2155 1700,2149.14 1700,2109.07 1699.31,2108.38 1699.31,1990.69 1700,1990 1902.28,1990 v1(1937.28,1955)
  Bottom Layer w10: v1(1250,2155) R6.1
MT6816_CS: U5.38 U7.1 | length 738.9
  Top Layer w10: v1(1988.12,1997.7) U5.38
  Signal Layer1 w10: v1(1710,1670.97) 1985.42,1670.97 1991.28,1676.83 1991.28,1969.96 1988.12,1973.12 v1(1988.12,1997.7)
  Bottom Layer w10: U7.1 1706.03,1677.1 1710,1673.14 v1(1710,1670.97)
NetC5_1: C5.1 R1.2 R2.1 U1.3 | length 774.2
  Top Layer w10: U1.3 1962.6,1255.86 1968.46,1250 v1(2100,1250) ; R2.1 2230,1525.69 C5.1 2292.84,1455 ; v1(2290,1430) 2292.84,1432.85 2292.84,1455 ; R1.2 2292.84,1455
  Signal Layer2 w10: v1(2100,1250) 2284.14,1250 2290,1255.86 v1(2290,1430)
NetC6_1: C6.1 C7.1 U1.1 | length 219.6
  Top Layer w10: U1.1 2169.89,1295 C7.1 C6.1
NetC6_2: C6.2 C7.2 D3.1 L1.1 U1.6 | length 988.1
  Top Layer w10: L1.1 v1(1720,1150) ; U1.6 2111.53,1204.53 ; v1(2110,1165) 2111.53,1166.53 2111.53,1204.53 ; D3.1 C6.2 C7.2 2230,1255.86 2224.14,1250 2140.86,1250 2135,1244.14 2135,1210.39 2129.14,1204.53 2111.53,1204.53
  Signal Layer2 w10: v1(1720,1150) 2092.84,1150 2107.84,1165 v1(2110,1165)
NetC10_2: C10.2 D4.1 R3.2 U1.5 | length 290.7
  Top Layer w10: U1.5 2000,1166.13 2030,1136.13 R3.2 2030,1133.87 2066.02,1097.84 D4.1 C10.2
NetC13_1: C13.1 U2.4 | length 94.7
  Top Layer w10: C13.1 2035.01,1549.99 U2.4
NetC14_2: C14.2 R4.2 R5.1 | length 145.3
  Bottom Layer w10: R4.2 R5.1 1955.11,2229.2 C14.2
NetC16_2: C16.2 R6.2 R7.1 | length 145
  Bottom Layer w10: C16.2 R6.2 R7.1
NetC19_2: C19.2 R13.1 U5.7 | length 384.2
  Top Layer w10: C19.2 1460.69,1890 R13.1 1465.69,1893.87 1493.47,1866.09 1493.47,1863.81 v1(1495,1862.28) ; v1(1606.4,1898.35) 1608.56,1898.35 1610.21,1896.69 U5.7
  Signal Layer2 w10: v1(1495,1862.28) 1570.33,1862.28 v1(1606.4,1898.35)
NetR3_1: R3.1 U1.4 | length 72.9
  Top Layer w10: U1.4 1962.6,1143.09 R3.1
NetR8_1: R8.1 U3.7 | length 112.4
  Bottom Layer w10: U3.7 1765,2240.31 R8.1@1781.2,2256.52 ; R8.1@1781.23,2256.52 1800,2275.29 R8.1
NetR9_1: R9.1 U4.7 | length 110.3
  Bottom Layer w10: U4.7 1535,2245.29 1565,2275.29 R9.1
NetR12_1: R12.1 U5.44 | length 508
  Top Layer w10: R12.1 1600,1965 v1(1630,1995) ; U5.44 1870,2039.57 1875.76,2033.8 1875.76,2033.64 1882,2027.41 v1(1882,1950)
  Signal Layer2 w10: v1(1630,1995) 1675,1950 v1(1882,1950)
NetR17_2: R17.2 R18.1 | length 95.7
  Top Layer w10: R18.1 2183.92,1967.71 2201.21,1985 2204.14,1985 2204.14,2048.45 R17.2
NetU5_5: U5.5 X1.3 | length 484.5
  Top Layer w10: X1.3 1393.46,2085 1414.23,2064.24 1414.67,2064.24 1428.91,2050 1465,2050 1495,2020 1674.14,2020 1680,2014.14 1680,1942.88 1686.82,1936.06 U5.5
NetU5_6: U5.6 X1.1 | length 643.8
  Top Layer w10: v1(1270,1990.89) 1359.62,1990.89 X1.1 ; v1(1630,1950) 1630,1947.84 1634,1943.84 1634,1941 1658.62,1916.38 U5.6
  Signal Layer2 w10: v1(1270,1990.89) 1270,1935.86 1275.86,1930 1450.35,1930 1470.35,1950 v1(1630,1950)
OUT_A+: CN4.1 U3.6 | length 451.2
  Top Layer w10: CN4.1 v1(1717.65,2502.65)
  Bottom Layer w10: U3.6 1715,2213.46 1760,2258.46 1760,2460.3 v1(1717.65,2502.65)
OUT_A-: CN4.3 U3.8 | length 693
  Top Layer w10: CN4.3 1599.53,2499.53 v1(1600,2500)
  Bottom Layer w10: v1(1600,2500) 1630,2530 1826.91,2530 1832.77,2524.14 1832.77,2247.79 1827.5,2242.52 1820.86,2242.52 1815,2236.66 U3.8
OUT_B+: CN4.4 U4.6 | length 449.8
  Top Layer w10: v1(1540,2500) 1540.24,2499.76 1540.24,2403.39 CN4.4
  Signal Layer2 w10: v1(1505,2255) 1505,2494.14 1510.86,2500 v1(1540,2500)
  Bottom Layer w10: U4.6 1485,2235 v1(1505,2255)
OUT_B-: CN4.6 U4.8 | length 791.8
  Top Layer w10: v1(1420,2500) 1421.18,2498.82 1421.18,2404.33 CN4.6
  Bottom Layer w10: v1(1420,2500) 1451.19,2468.81 1695.34,2468.81 1725,2439.14 1725,2255.86 1709.14,2240 1637.89,2240 1611.85,2213.96 1591.33,2213.96 1585,2207.63 U4.8
POWER_U: C26.1 R19.2 R20.1 U5.10 | length 748.9
  Top Layer w10: C26.1 R19.2 R20.1 1390,1658.87 1430,1618.87 v1(1430,1610) ; v1(1575,1610) 1575,1826.78 1585.86,1837.64 U5.10
  Signal Layer2 w10: v1(1430,1610) v1(1575,1610)
SPI1_MISO: U5.40 U7.6 | length 332.2
  Top Layer w10: v1(1930.05,2014.95) 1948.74,2033.64 U5.40
  Bottom Layer w10: U7.6 1926.38,1837.41 1971.55,1837.41 1975,1840.86 1975,1899.14 1969.14,1905 1961.44,1905 1961.15,1905.3 1935.91,1905.3 1919.28,1921.93 1919.28,1962.46 1920,1963.18 1920,2004.9 v1(1930.05,2014.95)
SPI1_MOSI: U5.41 U7.5 | length 215.3
  Top Layer w10: v1(1900,2015) 1904.65,2015 1923.29,2033.64 1923.29,2033.8 1929.06,2039.57 U5.41
  Bottom Layer w10: v1(1900,2015) 1900,1890.82 1905.82,1885 U7.5
SPI1_SCK: U5.39 U7.7 | length 372.7
  Top Layer w10: v1(1955.28,2014.72) 1956.81,2016.25 1960.4,2016.25 1968.43,2024.27 U5.39
  Bottom Layer w10: U7.7 1984.14,1785 1990,1790.86 1990,1905 1975,1920 1961.14,1920 1955.28,1925.86 v1(1955.28,2014.72)
SWCLK: CN3.4 U5.37 | length 355
  Top Layer w10: CN3.4 1995.82,2363.9 2018.1,2341.62 2018.1,2340.59 2020,2338.69 2020,2096.45 2014.06,2090.51 2007.87,2090.51 2007.8,2090.43 U5.37
SWDIO: CN3.5 U5.34 | length 827.5
  Top Layer w10: CN3.5 1936.77,2459.14 1942.63,2465 2019.14,2465 2028.26,2455.89 2028.26,2351.26 2032.1,2347.42 2032.1,2346.39 2038.49,2340 2139.14,2340 2145,2334.14 2145,1980.86 2139.14,1975 2083.86,1975 2083.43,1975.43 U5.34
TEMP: C18.2 R10.2 R11.2 U5.11 | length 1367.3
  Top Layer w10: v1(1600.17,1652.97) 1600,1653.14 1600,1812.09 1605.86,1817.95 U5.11
  Bottom Layer w10: v1(1600.17,1652.97) 2017.11,1652.97 2030,1665.86 R10.2 2030,2190 R11.2 2030,2200 2030,2270 C18.2
UART1_RX: CN3.2 U5.43 | length 721.3
  Top Layer w10: U5.43 1889.68,2474.26 1910.43,2495 2089.14,2495 2113.93,2470.21 CN3.2
UART1_TX: CN3.3 U5.42 | length 632.3
  Top Layer w10: U5.42 1909.37,2474.14 1915.23,2480 2048.92,2480 2054.78,2474.14 2054.78,2401.39 CN3.3
VCC: C1.1 C2.1 C3.1 C4.1 D1.1 D2.2 D4.2 R19.1 U3.5 U4.5 | length 3390.7
  Top Layer w10: v1(1075,1670) 1075,1672.16 1079,1676.16 1079,1678.14 1120.86,1720 1285,1720 1300,1735 R19.1 ; D1.1 1244.65,1350.35 v1(1260,1335) ; v1(1565,1290) 1565,1342.02 D2.2@1582.98,1360 ; D2.2 D2.2@1582.98,1360 ; D4.2 1938.98,1045 C4.1 C3.1 C2.1 C1.1 D2.2@1582.98,1360
  Signal Layer2 w10: v1(1565,1290) 1305,1290 v1(1260,1335) 1080.86,1335 1075,1340.86 1075,2209.14 1080.86,2215 v1(1405,2215) 1605.17,2215 1609.35,2210.83 v1(1634.17,2210.83)
  Bottom Layer w10: v1(1405,2215) 1428.67,2215 1435,2208.67 U4.5 ; v1(1634.17,2210.83) 1635.36,2209.64 1658.67,2209.64 1665,2203.32 U3.5
VCC_3V3: C11.2 C12.2 C20.2 C21.2 C22.2 C23.1 C24.1 C25.1 R10.1 R13.2 U2.5 U5.1 U5.9 U5.24 U5.36 U5.48 U6.3 U7.2 U7.4 | length 3840.3
  Top Layer w10: C12.2@1490,1465.39 C12.2@1490,1469.39 ; R13.2 R13.2@1525,1893.87 ; v1(1575,1580) C23.1@1519.14,1580 ; C11.2 1520.61,1500 C12.2@1490,1469.39 ; U5.1 1784.14,2014.8 1790,2020.66 ; C24.1 1780,1585.22 1804.23,1560.98 1809.02,1560.98 1840.11,1529.89 C25.1 1880,1500 ; U5.48 1791.18,2064.92 1791.18,2021.84 1790,2020.66 ; v1(1880.2,1579.8) 1880,1579.59 1880,1500 ; U2.5 1960,1462.57 1960,1494.14 1954.14,1500 1880,1500 ; U5.24 2167.63,1748.07 2220.35,1695.35 ; U5.36 2057.99,2052.99 v1(2065,2060) ; U6.3 2255,1660.7 2220.35,1695.35 ; v1(2255,1715) 2235.35,1695.35 2220.35,1695.35 ; C12.2@1490,1469.39 C23.1 1500,1580 C23.1@1519.14,1580 ; C23.1@1519.14,1580 1525,1585.86 C22.2 C21.2 C20.2 R13.2@1525,1893.87 ; R13.2@1525,1893.87 1561.54,1857.32 U5.9 1784.14,1857.32 1790,1863.18 1790,2020.66
  Signal Layer2 w10: v1(1575,1580) 1575.1,1579.9 v1@1880.1,1579.9 ; v1(1880.2,1579.8) v1@1880.1,1579.9 ; v1(2255,1715) 1895,1715 1880,1700 1880,1580 v1@1880.1,1579.9
  Bottom Layer w10: v1(1575,1580) 1599.14,1580 1605,1585.86 1605,1624.14 1599.14,1630 1580.86,1630 1575,1635.86 1575,1669.14 1580.86,1675 1649.14,1675 1655,1680.86 1655,1779.14 ; U7.2 1703.62,1782.59 1658.45,1782.59 1655,1779.14 ; U7.4 1705.25,1884.21 1660.86,1884.21 1655,1878.36 1655,1779.14 ; R10.1 2064.54,2114.54 2064.54,2060.46 v1(2065,2060) 2065,1720.86 2070.86,1715 v1(2255,1715)
VCC_5V: C5.2 C8.2 C9.2 L1.2 R2.2 U2.1 U2.3 | length 1534.2
  Top Layer w10: v1(1720,1110) 1845,1110 1846.21,1111.21 L1.2 1885,1188.79 v1(1885,1359.03) ; v1@1887.93,1357.07 1890.86,1360 U2.1 ; U2.3 v1(2105,1360) 2105,1449.14 2110.86,1455 C5.2 2175,1455.11 R2.2 ; v1(2110,1130) C9.2 C8.2
  Signal Layer2 w10: v1(1720,1110) 2090,1110 v1(2110,1130) ; v1(1885,1359.03) 1885.48,1359.52 2104.52,1359.52 v1(2105,1360)
VCC_IN: CN1.1 CN1.2 CN2.1 CN2.2 D1.2 | length 2655.2
  Top Layer w10: v1(1040,1335) 1040,1409.27 D1.2 ; v1(1045,1925) 1212.84,1925 CN1.1 CN1.2 ; CN2.2 CN2.1 2405.24,1630.71 2504.29,1630.71 v1(2504.53,1630.47)
  Signal Layer1 w10: v1(1040,1335) 1040,1520 1045,1525 1055,1515 2499.14,1515 2505,1520.86 2505,1630 v1(2504.53,1630.47) ; 1040,1525 1040,1721.42 1045,1726.42 v1(1045,1925)
VREF_A: C15.2 R5.2 U3.4 | length 607.2
  Signal Layer1 w10: v1(1620,2075) 1670,2125 v1(1855,2125)
  Bottom Layer w10: v1(1620,2075) 1654.14,2075 1665,2064.14 U3.4 ; R5.2 1860.86,2230 1855,2224.14 v1(1855,2125) 1855.86,2125 1889.25,2091.61 1889.25,2087.72 1900,2076.97 C15.2
VREF_B: C17.2 R7.2 U4.4 | length 804
  Signal Layer1 w10: v1(1150.22,2262.61) 1150.29,2262.54 1150.29,1970.43 v1(1150.36,1970.36)
  Bottom Layer w10: v1(1150.22,2262.61) 1150.74,2262.1 1300.69,2262.1 ; v1(1150.36,1970.36) 1432.47,1970.36 U4.4 ; C17.2 1300.69,2299.2 1300.69,2262.1 ; R7.2 1300.69,2262.1
pads on no net: CN1.7 CN1.8 CN2.7 CN2.8 CN3.6 CN3.7 CN4.2 CN4.5 CN4.7 CN4.8 SW1. SW2. U5.2 U5.3 U5.4 U5.16 U5.17 U5.18 U5.19 U5.26 U5.27 U5.28 U5.29 U5.30 U5.31 U5.32 U5.33 U6.5 U6.8 U7.3

## Polygon pours and split planes (outlines as drawn)
no net on Bottom Layer "NONET_L04_P001" (solid, pour order 1): 1925,2195 1875,2195 1870,2190 1870,2135 1875,2135 1910,2100 1925,2100 1925,2050 1920,2055 1825,2055 1825,2140 1395,2140 1390,2135 1390,2055 1330,2055 1330,2120 1275,2120 1260,2105 1260,2085 1255,2080 1095,2080 1095,2470 1150,2525 1290,2525 1315,2500 1315,2340 1320,2335 1325,2335 1325,2260 1400,2260 1400,2235 1470,2235 1485,2250 1485,2325 1630,2325 1635,2320 1635,2250 1705,2250 1715,2260 1715,2335 1710,2335 1665,2380 1455,2380 1395,2320 1390,2325 1390,2595 1370,2615 1165,2615 1125,2575 1100,2575 1020,2495 1020,2005 1025,2010 1390,2010 1410,2030 1555,2030 1555,2029.25 1575.49,2008.76 1575,2008.27 1575,1940 1600,1940 1615,1955 1615,2040 1605,2050 1605,2090 1620,2105 1635,2090 1680,2090 1680,2030 1775,2030 1805,2000 1805,1940 1857.37,1940 1862.11,1944.74 1865.07,1941.78 1865.07,1830.07 1855,1820 1855,1730 1865,1720 1965,1720 1965,1755 1960,1750 1880,1750 1880,1900 1870,1910 1870,1955 1835,1955 1830,1960 1845,1975 1845,2030 1965,2030 1975,2040 1975,2115 1960,2130 1925,2130
no net on Bottom Layer "NONET_L04_P000" (solid, pour order 0): 2070,2160 2090,2160 2100,2150 2100,1810 2195,1810 2195,2220 2215,2240 2410,2240 2430,2220 2430,1970 2370,1970 2345,1945 2350,1940 2350,1850 2500,1850 2525,1825 2525,1400 2515,1390 2280,1390 2255,1365 2260,1360 2260,1245 2205,1245 2200,1240 2200,1070 1980,1070 1940,1110 1940,1455 1935,1455 1910,1480 1905,1475 1870,1475 1820,1425 1770,1425 1770,1065 1740,1095 1235,1095 1200,1060 1200,1015 1205,1015 1215,1005 2445,1005 2590,1150 2590,2295 2535,2350 2535,2520 2460,2595 2150,2595 2105,2550 2105,2235 2080,2235 2070,2225
no net on Top Layer "NONET_L01_P010" (solid, pour order 10): 2555,2535 2555,2300 2590,2265 2575,2250 2575,1140 2550,1140 2425,1015 1145,1015 1145,1045 1010,1180 1010,2460 1070,2460 1210,2600 1225,2585 2505,2585
no net on Top Layer "NONET_L01_P004" (solid, pour order 4): 1280,1835 1035,1835 1035,1842.5 1030,1847.5 1030,1945 1045,1945 1055,1955 1280,1955
no net on Top Layer "NONET_L01_P003" (solid, pour order 3): 2515,1720 2325,1720 2320,1715 2325,1710 2325,1595 2430,1595 2440,1585 2435,1580 2435,1505 2505,1505 2515,1515
no net on Top Layer "NONET_L01_P002" (solid, pour order 2): 1175,1065 1175,1010 1420,1010 1425,1005 1425,1590 1380,1635 1360,1635 1360,1690 1355,1695 1285,1695 1270,1710 1145,1710 1105,1670 1105,1650 1050,1650 1030,1670 1030,2025 1035,2030 1040,2025 1285,2025 1285,2020 1290,2015 1435,2015 1435,1960 1420,1945 1310,1945 1290,1925 1290,1770 1360,1770 1365,1775 1365,1835 1430,1835 1430,1640 1445,1625 1495,1625 1495,1845 1490,1850 1460,1850 1445,1865 1360,1865 1360,1920 1540,1920 1550,1910 1550,1880 1565,1865 1770,1865 1775,1870 1775,1885 1575,1885 1570,1890 1570,1930 1555,1945 1490,1945 1490,2000 1475,2015 1475,2030 1460,2045 1440,2045 1435,2040 1430,2045 1415,2045 1415,2050 1410,2055 1045,2055 1045,2105 1055,2115 1085,2115 1085,2220 1005,2220 1000,2215 1000,1585 1275,1585 1305,1555 1305,1260 1315,1250 1315,1075 1185,1075
no net on Signal Layer1 "NONET_L02_P009" (solid, pour order 9): 2540,1455 2371.79,1623.21 1040,1623.21 1040,2495 1075,2530 1085,2520 2540,2520
no net on Signal Layer1 "NONET_L02_P006" (solid, pour order 6): 1090,1990 1000,1990 1000,1185 1065,1120 1085,1120 1095,1130 1090,1135 1090,1345 1100,1355 1845,1355 1880,1390 1880,1460 2035,1460 2115,1380 2210,1380 2285,1455 2290,1450 2530,1450 2585,1505 2585,1680 2565,1700 2395,1700 2375,1680 2375,1620 1895,1620 1895,1550 1395,1550 1295,1650 1065,1650 1065,1965
no net on Signal Layer2 "NONET_L03_P007" (solid, pour order 7): 1550,2570 1815,2305 2530,2305 2530,1990 2585,1935 2530,1880 2530,1385 2360,1385 2200,1225 2200,1070 1620,1070 1610,1060 1470,1200 1470,1230 1335,1230 1255,1310 1240,1295 1020,1295 1010,1305 1025,1320 1025,2490 1105,2570

## Silkscreen, mask and mechanical layers (free items; w line width, h text height)
Top Overlay:
  circle w10: c2025,2300 r1
  circle w10: c1980,2300 r1
  circle w10: c2002.5,2150 r21.36
  circle w10: c2035,2345 r5
  circle w10: c1970,2345 r5
  lines w10: 1970,2345 1970,2325 ; 2002.5,2150 2002.5,2275 ; 2035,2345 2035,2325 ; 1960,2220 1960,2165 1985,2165 1985,2220 2020,2220 2020,2165 2045,2165 2045,2220 ; 1960,2220 1960,2275 ; 1960,2220 2045,2220 ; 1960,2275 2045,2275 ; 1960,2275 1960,2315 1970,2325 ; 1970,2325 1975,2325 2035,2325 ; 2035,2325 2045,2315 2045,2275 ; 2045,2220 2045,2275
  text "Designed" at 1330,2291.66 h50
  text "By" at 1330,2206.66 h50
  text "HMS" at 1570,2205 h50
  text "Robotic Lab" at 1330,2125 h50
Mechanical 1:
  lines w10: 1000,1195 ccw(c1195,1195) 1195,1000 2420,1000 ccw(c2420,1200) 2620,1200 2620,2395 2620,2430 ccw(c2425,2425) 2420,2620 1195,2620 ccw(c1197.5,2422.5) 1000,2420 1000,1195